# EAGLE board Water_Schematic2_1 (EAGLE 9.5.1)
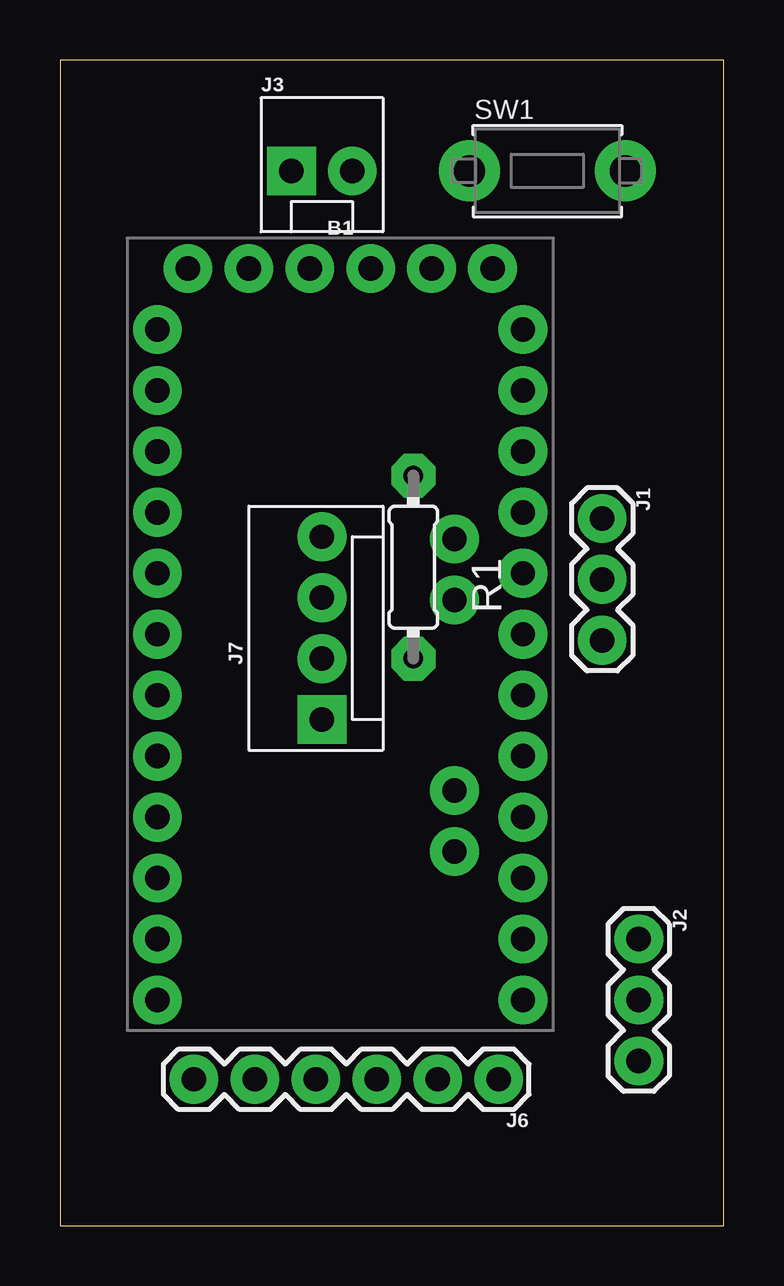
[diagram p0: board, top side]
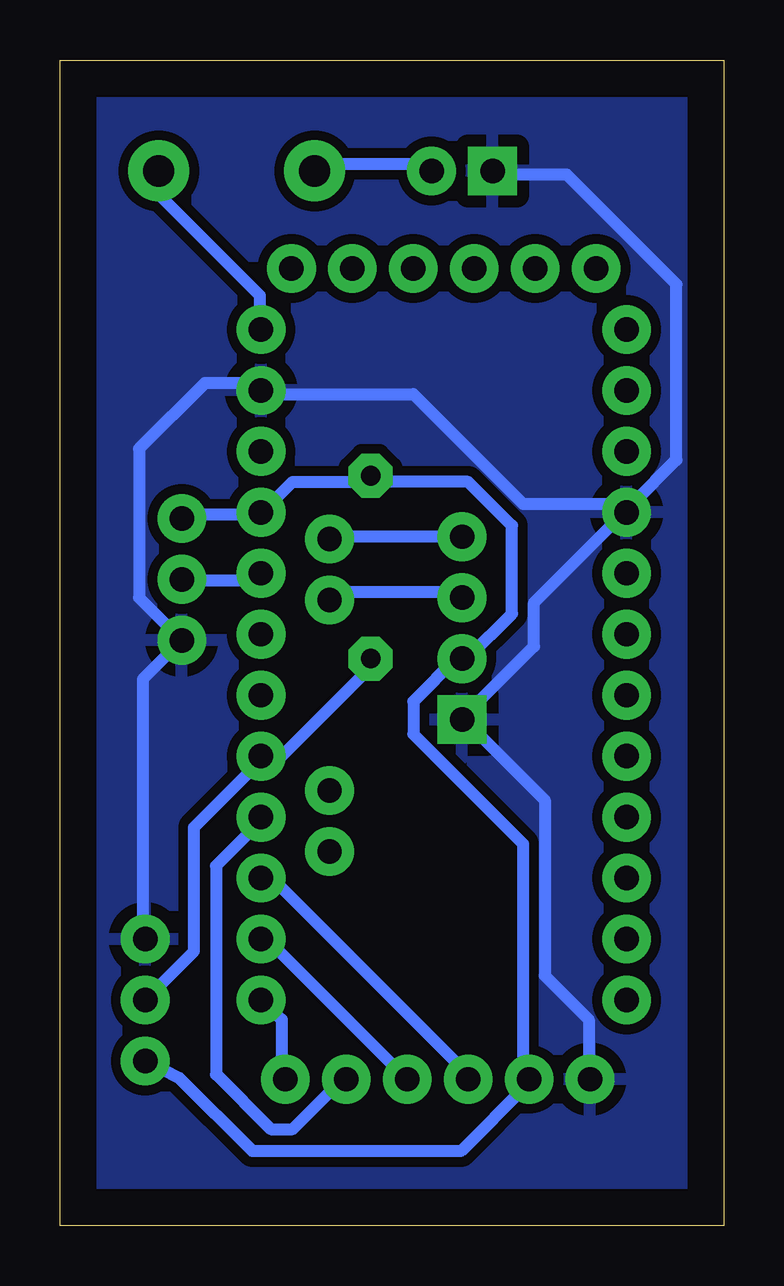
[diagram p1: board, bottom side, seen from below]

Size 27.69 x 48.56 mm. Coordinates in mm from the lower left corner, seen from the top.
Outline: 0,0 27.69,0 27.69,48.56 0,48.56 0,0
Copper layers (1*16): Top 0mil / dielectric 1.5mm / Bottom 0.035mm
Design rules "tad265_drc(1) *": minimum track width 20mil, minimum drill 0.35mm, track to track 16mil, track to pad 16mil, pad to pad 16mil, via to via 16mil, smd to smd 16mil, copper to edge 60mil, drill to drill 16mil, minimum pad ring 20mil, minimum via ring 15mil, stop-mask expansion 8mil, vias tented up to drill 0mil, thermal gap 20mil

## Footprints (pad centres in the part's own frame; a part is rotated, then mirrored left to right if it is on the bottom)
ARDUINO_PRO_MINI = drill 1.016 pad 1.88: 1 -7.62,12.7; 2 -7.62,10.16; 3 -7.62,7.62; 4 -7.62,5.08; 5 -7.62,2.54; 6 -7.62,0; 7 -7.62,-2.54; 8 -7.62,-5.08; 9 -7.62,-7.62; 10 -7.62,-10.16; 11 -7.62,-12.7; 12 -7.62,-15.24; 13 7.62,-15.24; 14 7.62,-12.7; 15 7.62,-10.16; 16 7.62,-7.62; 17 7.62,-5.08; 18 7.62,-2.54; 19 7.62,0; 20 7.62,2.54; 21 7.62,5.08; 22 7.62,7.62; 23 7.62,10.16; 24 7.62,12.7; A4 4.763,1.429; A5 4.763,3.969; A6 4.763,-9.049; A7 4.763,-6.509; BLK -6.35,15.24; GND -3.81,15.24; GRN 6.35,15.24; RXI 1.27,15.24; TXO 3.81,15.24; VCC -1.27,15.24
1X03 = drill 1.016 pad 1.88: 1 0,0; 2 2.54,0; 3 5.08,0
MOLEX-1X2 = drill 1.016 pad 1.88 square: 1 0,0 | drill 1.016 pad 1.88: 2 2.54,0
1X06 = drill 1.016 pad 1.88: 1 0,0; 2 2.54,0; 3 5.08,0; 4 7.62,0; 5 10.16,0; 6 12.7,0
MOLEX-1X4 = drill 1.016 pad 1.88 square: 1 0,0 | drill 1.016 pad 1.88: 2 2.54,0; 3 5.08,0; 4 7.62,0
0204/7 = drill 0.813 octagon: 1 -3.81,0; 2 3.81,0
TACT_PANA-EVQ = drill 1.3 pad 2.54: P$1 -3.25,0; P$2 3.25,0

## Placement (x,y rotation side)
B1  ARDUINO_PRO_MINI  [ARDUINO_PRO_MINI]  11.68,24.64 0 top
J1  Light  [1X03]  22.61,29.46 270 top
J2  Temp  [1X03]  24.13,11.94 270 top
J3  Battery  [MOLEX-1X2]  9.65,43.94 0 top
J6  SD  [1X06]  18.29,6.1 180 top
J7  RTC  [MOLEX-1X4]  10.92,21.08 90 top
R1  4.7K  [0204/7]  14.73,27.43 90 top
SW1  [TACT_PANA-EVQ]  20.32,43.94 0 top

## Library data of the parts
B1 = SparkFun-Boards
J1 J2 = SparkFun-Connectors; PROD_ID: XXX-00000
J3 = SparkFun-Connectors; SF_ID: PRT-09918
J6 = SparkFun-Connectors; PROD_ID: CONN-08437
J7 = SparkFun-Connectors; PROD_ID: CONN-08186; SF_ID: PRT-08231
R1 = rcl; SPICEPREFIX: R
SW1 = adafruit

## Nets
A0: B1.17 J2.2 R1.1
A3: B1.20 J1.2
BAT: J3.2 SW1.P$1
GND: B1.4 B1.23 J1.3 J2.1 J3.1 J6.6 J7.1
MISO: B1.15 J6.4
MOSI: B1.14 J6.3
SC: B1.13 J6.1
SCK: B1.16 J6.2
SCL: B1.A5 J7.4
SDA: B1.A4 J7.3
VCC: B1.21 J1.1 J2.3 J6.5 J7.2 R1.2
VIN: B1.24 SW1.P$2

## Tracks (layer width: path | path; a pad name or v marks a point on that pad's centre or on a via)
A0
  Bottom 0.508: R1.1 14.78,23.22 18.44,19.56 B1.17 19.3,19.39 22.1,16.59 22.1,11.43 J2.2
A3
  Bottom 0.508: J1.2 22.35,26.87 19.36,26.87 B1.20
BAT
  Bottom 0.508: J3.2 12.5,44.25 17.07,44.25 SW1.P$1
GND
  Bottom 0.508: J6.6 5.64,6.3 5.64,8.59 7.47,10.41 7.47,17.73 10.67,20.93 J7.1 10.67,21.39 7.92,24.13 7.92,25.96 4.27,29.62 B1.4 | 19.81,35.1 19.36,35.1 B1.23 | B1.4 4.27,30.07 8.38,30.07 12.95,34.65 18.9,34.65 B1.23 | J3.1 9.3,43.79 6.55,43.79 1.98,39.22 1.98,31.9 3.81,30.07 B1.4 | 19.81,35.1 21.64,35.1 24.38,32.36 24.38,26.16 J1.3 24.23,22.76 24.23,12.24 J2.1 | 19.81,35.1 B1.23
  pour Bottom: 0,0 0,48.51 27.69,48.51 27.69,0
MISO
  Bottom 0.508: J6.4 10.67,6.3 18.9,14.53 B1.15
MOSI
  Bottom 0.508: J6.3 18.9,11.79 B1.14
SC
  Bottom 0.508: J6.1 18.44,6.3 18.44,8.59 18.9,9.04 B1.13
SCK
  Bottom 0.508: J6.2 16.15,5.84 17.98,4.01 18.9,4.01 21.18,6.3 21.18,14.99 19.36,16.82 B1.16
SCL
  Bottom 0.508: J7.4 16.15,28.7 B1.A5
SDA
  Bottom 0.508: J7.3 11.12,26.42 16.15,26.42 B1.A4
VCC
  Bottom 0.508: J1.1 22.35,29.62 19.36,29.62 B1.21 18.9,30.07 17.98,30.99 14.78,30.99 R1.2 14.33,30.99 10.67,30.99 8.84,29.16 8.84,25.5 10.67,23.67 J7.2 11.12,23.67 12.95,21.84 12.95,20.47 8.38,15.9 8.38,6.3 J6.5 8.23,5.84 10.97,3.1 19.66,3.1 22.71,6.15 J2.3
VIN
  Bottom 0.508: B1.24 19.36,37.39 19.36,38.76 23.47,42.88 23.47,43.79 SW1.P$2